# Altium PCB Ender-3.PcbDoc (part 12 of 14)
Units mil, origin at the board's own origin, x right, y up, seen from the top; angles counter-clockwise.
Board outline 3970.48 x 2769.68 mil, 2 copper layers (TopLayer, BottomLayer); 146 components, 136 nets, 669 pads, 614 vias.
Unrouted connection lines stored in the file: 1.
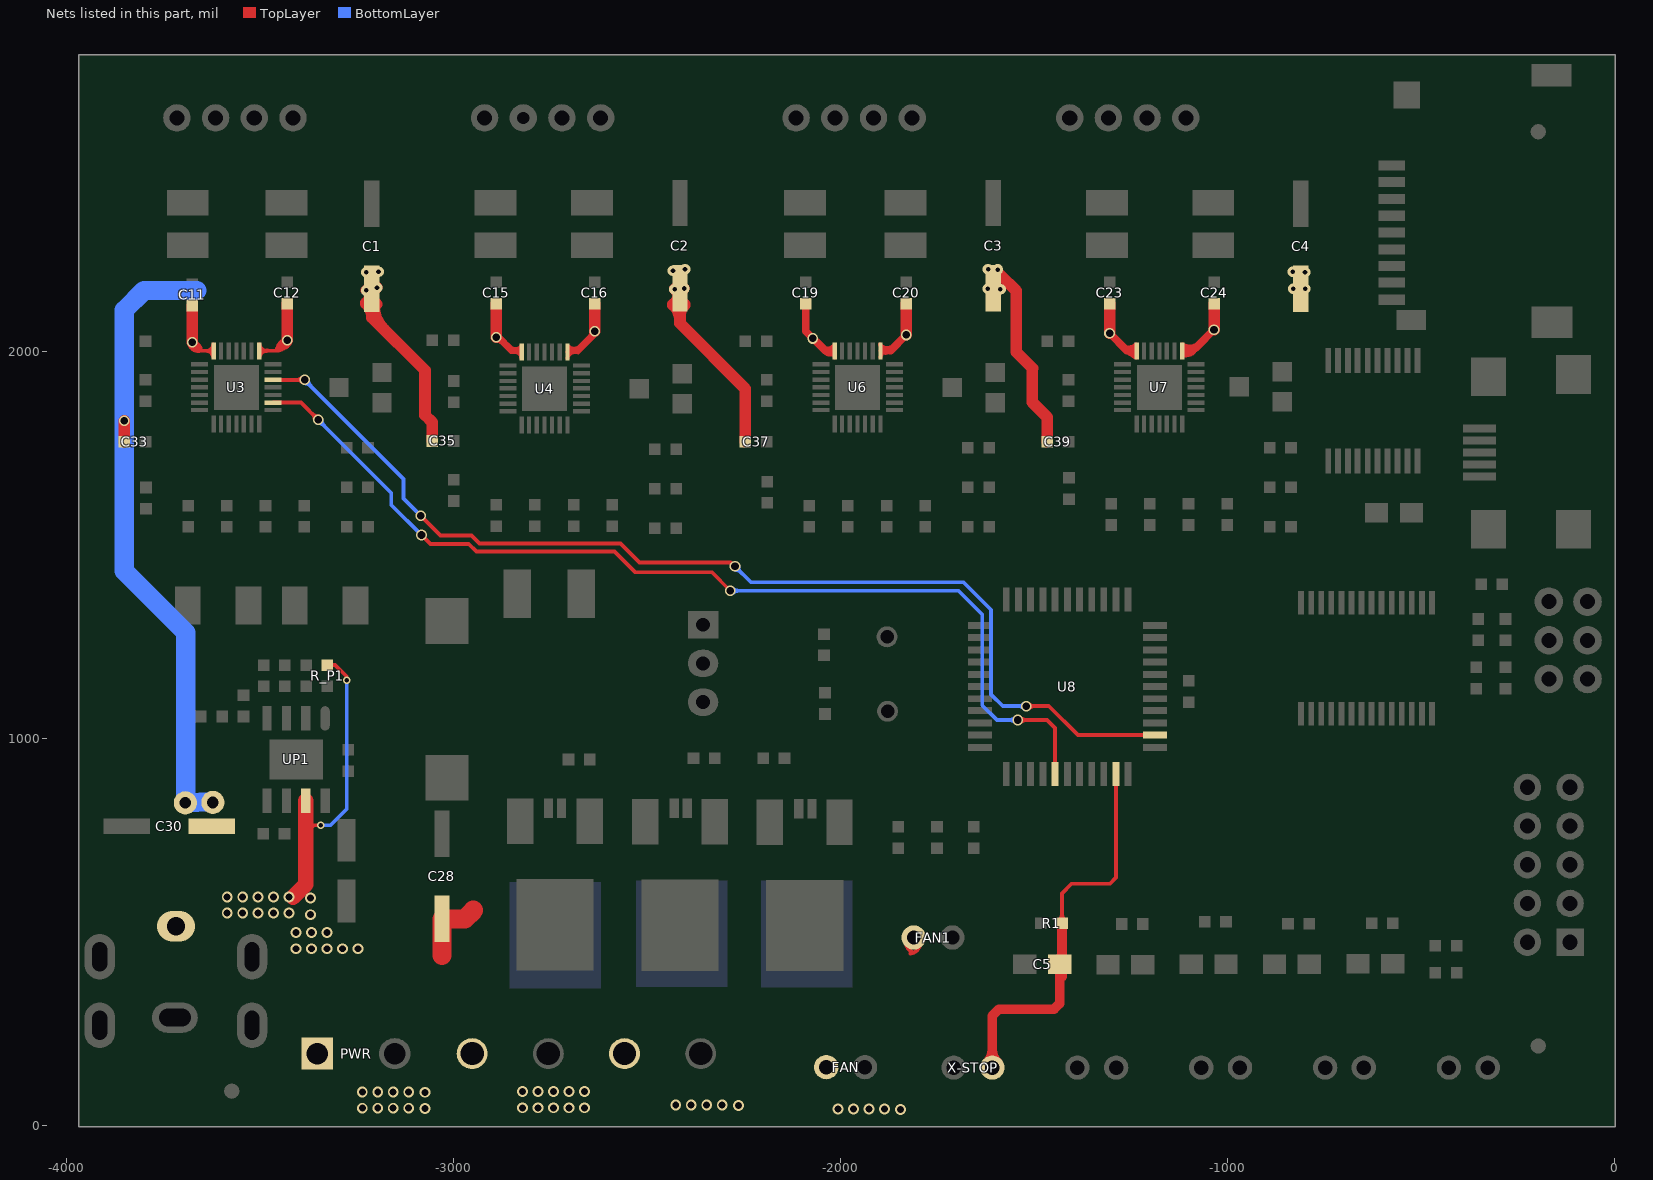
[diagram p12: the nets of this part, all layers, seen from the top]

## Via types
v1: diameter 28, hole 18, TopLayer to BottomLayer, tented both sides, 246 vias
v2: diameter 27.56, hole 19.68, TopLayer to BottomLayer, tented both sides, 196 vias
v3: diameter 20, hole 12, TopLayer to BottomLayer, tented both sides, 124 vias
v4: diameter 27.56, hole 11.81, TopLayer to BottomLayer, tented bottom, 16 vias
v5: diameter 27.56, hole 19.68, TopLayer to BottomLayer, 16 vias
v6: diameter 20, hole 12, TopLayer to BottomLayer, 12 vias
v7: diameter 28, hole 11.81, TopLayer to BottomLayer, tented both sides, 4 vias

## Nets (pads, with @x,y where several pads share a name; then routed paths per layer and width w, separated by ;. In a path a pad name is that pad's centre, name@x,y a point inside that pad or via, vN(x,y) a via of type N, cw(c..) or ccw(c..) an arc to the next point about the centre after c; other vN are vias at no path point) (continued)
VMOT: C1.1 C2.1 C3.1 C4.1 C11.2 C12.1 C15.2 C16.1 C19.2 C20.1 C23.2 C24.1 C28.1 C30.1 C33.2 C35.2 C37.2 C39.2 FAN1.2 FAN.2 pad.1@-2557.83,186.84 pad.1@-2951.54,186.84 pad.2 pad.3 PWR.2 R_P1.1 U3.22 U3.28 U4.22 U4.28 U6.22 U6.28 U7.22 U7.28 UP1.7 | length 13788.4
  TopLayer w10: v2@-3683.54,2022.84 ccw(c-3658.07,2028.34) -3652.57,2002.88 ; -3641.54,2002.88 cw(c-3639.05,1984.36) U3.28@-3620.54,1986.84 ; -3637.54,2002.88 ccw(c-3637.52,2019.86) U3.28@-3620.54,2019.84 ; U3.28@-3619.62,2002.88 -3652.57,2002.88 ; U3.22@-3501.62,2002.88 -3456.5,2002.88 ; U3.22@-3501.54,2019.84 ccw(c-3482.05,2022.36) -3479.54,2002.88 ; U3.22@-3500.54,1987.84 cw(c-3481.02,1983.36) -3476.54,2002.88 ; -3447.28,2012.09 ccw(c-3440.28,2029.84) -3437.2,2011.02 ; v2@-3422.54,2022.84 cw(c-3440.28,2029.84) -3437.2,2011.02 ; v2@-3420.54,2034.84 ccw(c-3422.54,2000.88) -3429.54,2034.17 ccw(c-3422.54,2000.88) -3456.5,2002.88 ; -3368.54,767.84 -3359.54,776.84 v3(-3342.54,776.84) ; R_P1.1@-3325.54,1190.84 -3305.54,1190.84 -3275.54,1160.84 v3(-3275.54,1151.84) ; v2(-2889.54,2037.84) -2851.54,1999.84 -2840.54,1999.84 ; v2@-2889.54,2039.06 cw(c-2889.54,2013.04) -2871.13,2031.44 ; v2@-2878.54,2038.84 -2850.54,2010.84 ; -2854.06,2014.37 ccw(c-2889.54,1978.9) v2@-2889.54,2029.06 ; -2842.54,1999.84 cw(c-2841.54,1982.84) -2840.68,1999.85 ; -2841.54,1999.84 ccw(c-2840.54,2015.84) -2840.15,1999.82 ; U4.28@-2824.54,1983.84 ccw(c-2841.54,1982.84) -2840.15,1999.82 ; U4.28@-2823.54,1999.84 -2840.54,1999.84 ; U4.22@-2705.54,1983.84 cw(c-2684.04,1978.34) -2689.54,1999.84 cw(c-2684.04,1978.34) -2689.03,1999.97 ; U4.22@-2705.04,1999.84 -2678.54,1999.84 ; -2677.54,1998.84 v2@-2632.54,2043.84 ; -2675.6,2012.78 cw(c-2688.54,2028.78) -2704.54,2015.84 ccw(c-2683.54,2020.84) -2689.03,1999.97 ; v2(-2634.54,2053.84) -2688.54,1999.84 ; -2050.35,2014.7 ccw(c-2034.52,2033.68) -2015.54,2017.84 cw(c-2034.52,2021.86) -2030.5,2002.88 cw(c-2034.52,2021.86) -2031.02,2002.78 ; -2048.54,2009.84 ccw(c-2025.04,2017.34) U6.28@-2017.67,1993.8 ; -2029.54,2002.88 ccw(c-2019.02,2004.36) -2029.46,2002.41 ; -2020.54,2002.88 cw(c-2029.54,2011.88) -2024.4,2000.24 ; U6.28@-2016.12,2002.88 -2038.54,2002.88 ; U6.28@-2014.54,1985.84 ccw(c-2035.05,1982.36) U6.28@-2017.67,1993.8 ; U6.22@-1896.62,2002.88 ccw(c-1883.58,2015.93) -1889.39,1998.42 ; U6.22@-1896.54,1986.84 cw(c-1875.52,1981.86) -1889.39,1998.42 ; U6.22@-1896.12,2002.88 -1870.54,2002.88 ; -1880.57,2002.88 cw(c-1875.56,2024.86) -1897.54,2019.84 ccw(c-1879.54,2030.84) -1868.54,2012.84 ; -1880.5,2002.88 cw(c-1875.52,1981.86) -1870.54,2002.88 ; FAN1.2@-1829.54,485.84 ccw(c-1801.04,476.34) -1810.54,447.84 ; -1818.54,445.84 ccw(c-1822.04,474.34) FAN1.2@-1793.54,477.84 ; -1275.46,2018.8 ccw(c-1256.52,2038.78) -1236.54,2019.84 cw(c-1256.52,2022.86) -1253.04,2002.96 ; -1248.54,2002.88 ccw(c-1233.52,2000.86) -1248.64,2001.81 ; U7.28@-1239.54,1993.84 cw(c-1245.02,2008.36) -1246.41,1992.91 ; U7.28@-1236.12,2002.88 -1259.54,2002.88 ; U7.22@-1117.54,1991.84 ccw(c-1109.04,2024.02) -1079.36,2008.96 ; U7.22@-1116.62,2002.88 ccw(c-1106.08,2013.43) -1095.84,2002.59 ; U7.22@-1116.12,2002.88 -1088.54,2002.88 ; -1096.54,2011.84 cw(c-1102.54,2025.84) -1116.54,2019.84 ccw(c-1096.54,2052.84) -1087.95,2015.22 ; -1095.54,2002.88 cw(c-1106.08,2013.43) -1095.84,2002.59 ; -1076.86,2015.52 cw(c-1109.04,2024.02) -1079.36,2008.96 ; -1075.31,2017.06 cw(c-1093.52,2021.08) -1079.36,2008.96 ; -1073.31,2017.06 ccw(c-1078.33,1997.86) -1074.96,2017.42 ccw(c-1078.33,1997.86) -1080.97,2017.53 ; -1063.54,2032.84 cw(c-1096.54,2052.84) -1080.97,2017.53 ; v2@-3674.54,2016.06 cw(c-3674.54,1994.87) -3659.55,2009.85 ; v2@-3674.54,2016.06 cw(c-3674.54,1994.87) -3659.55,2009.85 ; v2@-3674.54,2016.06 cw(c-3674.54,1994.87) -3659.55,2009.85 ; v2@-3674.54,2016.06 cw(c-3674.54,1994.87) -3659.55,2009.85 ; v2@-3674.54,2016.06 cw(c-3674.54,1994.87) -3659.55,2009.85 ; v2@-3674.54,2016.06 cw(c-3674.54,1994.87) -3659.55,2009.85 ; v2@-3674.54,2016.06 cw(c-3674.54,1994.87) -3659.55,2009.85 ; v2@-3674.54,2016.06 cw(c-3674.54,1994.87) -3659.55,2009.85 ; v2@-3674.54,2016.06 cw(c-3674.54,1994.87) -3659.55,2009.85 ; v2@-3665.76,2024.84 ccw(c-3644.56,2024.84) -3659.55,2009.85 ; v2@-3665.76,2024.84 ccw(c-3644.56,2024.84) -3659.55,2009.85 ; v2@-3665.76,2024.84 ccw(c-3644.56,2024.84) -3659.55,2009.85 ; v2@-3665.76,2024.84 ccw(c-3644.56,2024.84) -3659.55,2009.85 ; v2@-3665.76,2024.84 ccw(c-3644.56,2024.84) -3659.55,2009.85 ; v2@-3665.76,2024.84 ccw(c-3644.56,2024.84) -3659.55,2009.85 ; v2@-3665.76,2024.84 ccw(c-3644.56,2024.84) -3659.55,2009.85 ; v2@-3665.76,2024.84 ccw(c-3644.56,2024.84) -3659.55,2009.85 ; v2@-3665.76,2024.84 ccw(c-3644.56,2024.84) -3659.55,2009.85 ; -3652.57,2002.88 ccw(c-3674.54,2002.88) v2(-3674.54,2024.84) -3652.57,2002.88 ; -3456.5,2002.88 ccw(c-3456.5,2029.84) -3437.2,2011.02 ; -3456.5,2002.88 v2(-3429.54,2029.84) cw(c-3456.5,2029.84) -3437.2,2011.02 ; -3444.52,2014.85 cw(c-3429.54,1999.87) v2@-3429.54,2021.06 ; -3444.52,2014.85 ccw(c-3459.51,2029.84) v2@-3438.31,2029.84 ; -3444.52,2014.85 cw(c-3429.54,1999.87) v2@-3429.54,2021.06 ; -3444.52,2014.85 ccw(c-3459.51,2029.84) v2@-3438.31,2029.84 ; -3444.52,2014.85 cw(c-3429.54,1999.87) v2@-3429.54,2021.06 ; -3444.52,2014.85 ccw(c-3459.51,2029.84) v2@-3438.31,2029.84 ; -3444.52,2014.85 cw(c-3429.54,1999.87) v2@-3429.54,2021.06 ; -3444.52,2014.85 ccw(c-3459.51,2029.84) v2@-3438.31,2029.84 ; -3444.52,2014.85 cw(c-3429.54,1999.87) v2@-3429.54,2021.06 ; -3444.52,2014.85 ccw(c-3459.51,2029.84) v2@-3438.31,2029.84 ; -3444.52,2014.85 ccw(c-3459.51,2029.84) v2@-3438.31,2029.84 ; -3444.52,2014.85 cw(c-3429.54,1999.87) v2@-3429.54,2021.06 ; -3444.52,2014.85 ccw(c-3459.51,2029.84) v2@-3438.31,2029.84 ; -3444.52,2014.85 cw(c-3429.54,1999.87) v2@-3429.54,2021.06 ; -3444.52,2014.85 ccw(c-3459.51,2029.84) v2@-3438.31,2029.84 ; -3444.52,2014.85 cw(c-3429.54,1999.87) v2@-3429.54,2021.06 ; -3444.52,2014.85 ccw(c-3459.51,2029.84) v2@-3438.31,2029.84 ; -3444.52,2014.85 cw(c-3429.54,1999.87) v2@-3429.54,2021.06 ; v2@-2889.61,2039.06 cw(c-2888.17,2016.49) -2872.17,2032.48 ; v2@-2889.61,2039.06 cw(c-2888.17,2016.49) -2872.17,2032.48 ; v2@-2889.61,2039.06 cw(c-2888.17,2016.49) -2872.17,2032.48 ; v2@-2889.61,2039.06 cw(c-2888.17,2016.49) -2872.17,2032.48 ; v2@-2889.61,2039.06 cw(c-2888.17,2016.49) -2872.17,2032.48 ; v2@-2889.61,2039.06 cw(c-2888.17,2016.49) -2872.17,2032.48 ; v2@-2889.61,2039.06 cw(c-2888.17,2016.49) -2872.17,2032.48 ; v2@-2889.61,2039.06 cw(c-2888.17,2016.49) -2872.17,2032.48 ; v2@-2889.54,2029.06 cw(c-2889.54,2007.87) -2874.55,2022.85 ; v2@-2889.54,2029.06 cw(c-2889.54,2007.87) -2874.55,2022.85 ; v2@-2889.54,2029.06 cw(c-2889.54,2007.87) -2874.55,2022.85 ; v2@-2889.54,2029.06 cw(c-2889.54,2007.87) -2874.55,2022.85 ; v2@-2889.54,2029.06 cw(c-2889.54,2007.87) -2874.55,2022.85 ; v2@-2889.54,2029.06 cw(c-2889.54,2007.87) -2874.55,2022.85 ; v2@-2889.54,2029.06 cw(c-2889.54,2007.87) -2874.55,2022.85 ; v2@-2889.54,2029.06 cw(c-2889.54,2007.87) -2874.55,2022.85 ; v2@-2889.54,2029.06 cw(c-2889.54,2007.87) -2874.55,2022.85 ; v2@-2888.97,2029.08 cw(c-2886.29,1987.09) -2856.54,2016.84 ; v2@-2888.97,2029.08 cw(c-2886.29,1987.09) -2856.54,2016.84 ; v2@-2888.97,2029.08 cw(c-2886.29,1987.09) -2856.54,2016.84 ; v2@-2888.97,2029.08 cw(c-2886.29,1987.09) -2856.54,2016.84 ; v2@-2888.97,2029.08 cw(c-2886.29,1987.09) -2856.54,2016.84 ; v2@-2888.97,2029.08 cw(c-2886.29,1987.09) -2856.54,2016.84 ; v2@-2888.97,2029.08 cw(c-2886.29,1987.09) -2856.54,2016.84 ; v2@-2888.97,2029.08 cw(c-2886.29,1987.09) -2856.54,2016.84 ; v2@-2880.76,2037.84 ccw(c-2859.56,2037.84) -2874.55,2022.85 ; v2@-2880.76,2037.84 ccw(c-2859.56,2037.84) -2874.55,2022.85 ; v2@-2880.76,2037.84 ccw(c-2859.56,2037.84) -2874.55,2022.85 ; v2@-2880.76,2037.84 ccw(c-2859.56,2037.84) -2874.55,2022.85 ; v2@-2880.76,2037.84 ccw(c-2859.56,2037.84) -2874.55,2022.85 ; v2@-2880.76,2037.84 ccw(c-2859.56,2037.84) -2874.55,2022.85 ; v2@-2880.76,2037.84 ccw(c-2859.56,2037.84) -2874.55,2022.85 ; v2@-2880.76,2037.84 ccw(c-2859.56,2037.84) -2874.55,2022.85 ; v2@-2880.76,2037.84 ccw(c-2859.56,2037.84) -2874.55,2022.85 ; -2850.54,2010.84 ccw(c-2840.04,2010.34) -2840.68,1999.85 ; -2850.54,2010.84 ccw(c-2839.54,2025.84) -2824.54,2014.84 cw(c-2840.54,2015.84) -2839.54,1999.84 cw(c-2840.54,2015.84) -2840.15,1999.82 ; -2840.68,1999.85 cw(c-2841.54,1982.84) -2840.54,1999.84 ; -2840.68,1999.85 ccw(c-2840.04,2010.34) -2840.54,1999.84 ; -2840.54,1999.84 cw(c-2841.54,1982.84) -2840.15,1999.82 ; -2689.03,1999.97 ccw(c-2683.54,2020.84) -2688.54,1999.84 ; -2689.03,1999.97 cw(c-2684.04,1978.34) -2688.25,2000.13 cw(c-2684.04,1978.34) -2678.54,1999.84 ; -2688.54,1999.84 ccw(c-2683.54,2020.84) -2678.54,1999.84 ; -2658.01,2018.37 ccw(c-2693.48,2053.84) v2@-2643.31,2053.84 ; -2658.01,2018.37 ccw(c-2693.48,2053.84) v2@-2643.31,2053.84 ; -2658.01,2018.37 ccw(c-2693.48,2053.84) v2@-2643.31,2053.84 ; -2658.01,2018.37 ccw(c-2693.48,2053.84) v2@-2643.31,2053.84 ; -2658.01,2018.37 ccw(c-2693.48,2053.84) v2@-2643.31,2053.84 ; -2658.01,2018.37 ccw(c-2693.48,2053.84) v2@-2643.31,2053.84 ; -2658.01,2018.37 ccw(c-2693.48,2053.84) v2@-2643.31,2053.84 ; -2658.01,2018.37 ccw(c-2693.48,2053.84) v2@-2643.31,2053.84 ; -2658.01,2018.37 ccw(c-2693.48,2053.84) v2@-2643.31,2053.84 ; -2649.52,2038.85 cw(c-2634.54,2023.87) v2@-2634.54,2045.06 ; -2649.52,2038.85 ccw(c-2664.51,2053.84) v2@-2643.31,2053.84 ; -2649.52,2038.85 cw(c-2634.54,2023.87) v2@-2634.54,2045.06 ; -2649.52,2038.85 ccw(c-2664.51,2053.84) v2@-2643.31,2053.84 ; -2649.52,2038.85 cw(c-2634.54,2023.87) v2@-2634.54,2045.06 ; -2649.52,2038.85 ccw(c-2664.51,2053.84) v2@-2643.31,2053.84 ; -2649.52,2038.85 cw(c-2634.54,2023.87) v2@-2634.54,2045.06 ; -2649.52,2038.85 ccw(c-2664.51,2053.84) v2@-2643.31,2053.84 ; -2649.52,2038.85 cw(c-2634.54,2023.87) v2@-2634.54,2045.06 ; -2649.52,2038.85 ccw(c-2664.51,2053.84) v2@-2643.31,2053.84 ; -2649.52,2038.85 ccw(c-2664.51,2053.84) v2@-2643.31,2053.84 ; -2649.52,2038.85 cw(c-2634.54,2023.87) v2@-2634.54,2045.06 ; -2649.52,2038.85 ccw(c-2664.51,2053.84) v2@-2643.31,2053.84 ; -2649.52,2038.85 cw(c-2634.54,2023.87) v2@-2634.54,2045.06 ; -2649.52,2038.85 ccw(c-2664.51,2053.84) v2@-2643.31,2053.84 ; -2649.52,2038.85 cw(c-2634.54,2023.87) v2@-2634.54,2045.06 ; -2649.52,2038.85 ccw(c-2664.51,2053.84) v2@-2643.31,2053.84 ; -2649.52,2038.85 cw(c-2634.54,2023.87) v2@-2634.54,2045.06 ; -2640.94,2035.44 ccw(c-2659.34,2053.84) v2@-2633.31,2053.84 ; -2640.94,2035.44 ccw(c-2659.34,2053.84) v2@-2633.31,2053.84 ; -2640.94,2035.44 ccw(c-2659.34,2053.84) v2@-2633.31,2053.84 ; -2640.94,2035.44 ccw(c-2659.34,2053.84) v2@-2633.31,2053.84 ; -2640.94,2035.44 ccw(c-2659.34,2053.84) v2@-2633.31,2053.84 ; -2640.94,2035.44 ccw(c-2659.34,2053.84) v2@-2633.31,2053.84 ; -2640.94,2035.44 ccw(c-2659.34,2053.84) v2@-2633.31,2053.84 ; -2640.94,2035.44 ccw(c-2659.34,2053.84) v2@-2633.31,2053.84 ; -2640.94,2035.44 ccw(c-2659.34,2053.84) v2@-2633.31,2053.84 ; -2038.54,2002.88 ccw(c-2029.54,2011.88) -2028.31,1999.21 ; -2038.53,2002.88 ccw(c-2034.52,2021.86) -2031.02,2002.78 ; -2038.53,2002.88 cw(c-2035.05,1982.36) -2031.57,2002.88 cw(c-2035.05,1982.36) -2031.02,2002.78 ; -2031.02,2002.78 cw(c-2035.05,1982.36) -2029.46,2002.41 ; -2029.46,2002.41 ccw(c-2019.02,2004.36) -2028.31,1999.21 ; -2029.46,2002.41 cw(c-2035.05,1982.36) -2024.4,2000.24 ; -2028.31,1999.21 ccw(c-2029.54,2011.88) -2024.4,2000.24 ; -2028.31,1999.21 ccw(c-2019.02,2004.36) U6.28@-2017.68,1993.82 ; -2024.4,2000.24 cw(c-2035.05,1982.36) U6.28@-2017.68,1993.82 ; U6.28@-2017.67,1993.8 ccw(c-2025.04,2017.34) -2017.54,1993.84 cw(c-2019.02,2004.36) U6.28@-2017.68,1993.82 ; -1889.39,1998.42 cw(c-1875.52,1981.86) -1880.53,2002.87 ccw(c-1875.56,2024.86) -1870.54,2002.88 ; -1889.39,1998.42 ccw(c-1883.58,2015.93) -1870.54,2002.88 ; -1259.53,2002.88 ccw(c-1256.52,2022.86) -1253.5,2002.88 ccw(c-1256.52,2022.86) -1253.04,2002.96 ; -1259.54,2002.88 ccw(c-1245.02,2008.36) -1246.41,1992.91 ; -1259.53,2002.88 cw(c-1256.05,1982.36) -1253.04,2002.96 ; -1253.04,2002.96 cw(c-1256.05,1982.36) -1252.57,2002.88 cw(c-1256.05,1982.36) -1248.64,2001.81 ; -1248.64,2001.81 cw(c-1256.05,1982.36) -1235.54,1985.84 cw(c-1233.52,2000.86) -1246.41,1992.91 ; -1248.64,2001.81 ccw(c-1233.52,2000.86) -1246.41,1992.91 ; -1095.84,2002.59 cw(c-1093.52,2021.08) -1097.54,2002.88 cw(c-1078.33,1997.86) -1087.95,2015.22 ; -1095.84,2002.59 ccw(c-1093.52,2021.08) -1089.5,2002.88 ccw(c-1093.52,2021.08) -1079.36,2008.96 ; -1087.95,2015.22 cw(c-1078.33,1997.86) -1080.97,2017.53 ; -1087.95,2015.22 ccw(c-1096.54,2052.84) -1080.97,2017.53
  TopLayer w20: C19.2@-2089.54,2124.84 -2089.54,2053.88 -2038.54,2002.88 ; -1870.54,2002.88 v2(-1829.54,2043.88) ; v2(-1304.54,2047.88) -1259.54,2002.88 ; -1082.54,2009.84 v2@-1028.54,2063.84
  TopLayer w30: C33.2@-3850.62,1767.88 v2(-3850.62,1821.76) ; v2(-3674.54,2024.84) C11.2@-3674.54,2119.84 ; v2(-3429.54,2029.84) C12.1@-3429.54,2124.84 ; C1.1@-3226.67,2126.71 cw(c-3265.42,2087.96) -3210.62,2087.96 ; C35.2@-3054.54,1769.84 -3054.54,1817.84 -3073.54,1836.84 -3073.54,1952.84 -3210.62,2089.93 ; v2(-2889.54,2037.84) C15.2@-2889.54,2124.84 ; v2(-2634.54,2053.84) C16.1@-2634.54,2124.84 ; C2.1@-2414.54,2164.84 -2414.54,2073.84 -2245.62,1904.93 C37.2@-2245.62,1767.88 ; v2(-1829.54,2043.88) C20.1@-1829.54,2124.84 ; C3.1@-1586.54,2198.84 -1545.54,2157.84 -1545.54,1999.84 -1503.54,1957.84 ; -1504.54,1956.84 -1504.54,1869.84 -1465.62,1830.93 C39.2@-1465.62,1767.88 ; v2(-1304.54,2047.88) C23.2@-1304.54,2124.84 ; v2(-1034.54,2056.88) C24.1@-1034.54,2124.84 ; C1.1@-3226.69,2124.97 ccw(c-3263.4,2162.88) C1.1@-3210.62,2162.88 ; C1.1@-3226.69,2124.97 ccw(c-3263.4,2162.88) C1.1@-3210.62,2162.88 ; C1.1@-3226.69,2124.97 ccw(c-3263.4,2162.88) C1.1@-3210.62,2162.88 ; C1.1@-3226.69,2124.97 ccw(c-3263.4,2162.88) C1.1@-3210.62,2162.88 ; C1.1@-3226.69,2124.97 ccw(c-3263.4,2162.88) C1.1@-3210.62,2162.88 ; C1.1@-3226.69,2124.97 ccw(c-3263.4,2162.88) C1.1@-3210.62,2162.88 ; C1.1@-3226.69,2124.97 ccw(c-3263.4,2162.88) C1.1@-3210.62,2162.88 ; C1.1@-3226.69,2124.97 ccw(c-3263.4,2162.88) C1.1@-3210.62,2162.88 ; C1.1@-3226.69,2124.97 ccw(c-3263.4,2162.88) C1.1@-3210.62,2162.88 ; C1.1@-3226.71,2126.74 cw(c-3260.78,2089.93) -3210.62,2089.93 ; C1.1@-3226.71,2126.74 cw(c-3260.78,2089.93) -3210.62,2089.93 ; C1.1@-3226.71,2126.74 cw(c-3260.78,2089.93) -3210.62,2089.93 ; C1.1@-3226.71,2126.74 cw(c-3260.78,2089.93) -3210.62,2089.93 ; C1.1@-3226.71,2126.74 cw(c-3260.78,2089.93) -3210.62,2089.93 ; C1.1@-3226.71,2126.74 cw(c-3260.78,2089.93) -3210.62,2089.93 ; C1.1@-3226.71,2126.74 cw(c-3260.78,2089.93) -3210.62,2089.93 ; C1.1@-3226.71,2126.74 cw(c-3260.78,2089.93) -3210.62,2089.93 ; C1.1@-3224.67,2159.71 cw(c-3258.59,2125.79) C1.1@-3210.62,2125.79 ; C1.1@-3224.67,2159.71 cw(c-3258.59,2125.79) C1.1@-3210.62,2125.79 ; C1.1@-3224.67,2159.71 cw(c-3258.59,2125.79) C1.1@-3210.62,2125.79 ; C1.1@-3224.67,2159.71 cw(c-3258.59,2125.79) C1.1@-3210.62,2125.79 ; C1.1@-3224.67,2159.71 cw(c-3258.59,2125.79) C1.1@-3210.62,2125.79 ; C1.1@-3224.67,2159.71 cw(c-3258.59,2125.79) C1.1@-3210.62,2125.79 ; C1.1@-3224.67,2159.71 cw(c-3258.59,2125.79) C1.1@-3210.62,2125.79 ; C1.1@-3224.67,2159.71 cw(c-3258.59,2125.79) C1.1@-3210.62,2125.79 ; C1.1@-3224.67,2159.71 cw(c-3258.59,2125.79) C1.1@-3210.62,2125.79 ; -3210.62,2089.93 C1.1@-3210.62,2162.88 ; C1.1@-3210.62,2137.19 cw(c-3168.89,2137.19) C1.1@-3198.4,2166.71 ; C1.1@-3210.62,2137.19 cw(c-3168.89,2137.19) C1.1@-3198.4,2166.71 ; C1.1@-3210.62,2137.19 cw(c-3168.89,2137.19) C1.1@-3198.4,2166.71 ; C1.1@-3210.62,2137.19 cw(c-3168.89,2137.19) C1.1@-3198.4,2166.71 ; C1.1@-3210.62,2137.19 cw(c-3168.89,2137.19) C1.1@-3198.4,2166.71 ; C1.1@-3210.62,2137.19 cw(c-3168.89,2137.19) C1.1@-3198.4,2166.71 ; C1.1@-3210.62,2137.19 cw(c-3168.89,2137.19) C1.1@-3198.4,2166.71 ; C1.1@-3210.62,2137.19 cw(c-3168.89,2137.19) C1.1@-3198.4,2166.71 ; C1.1@-3210.62,2137.19 cw(c-3168.89,2137.19) C1.1@-3198.4,2166.71 ; C1.1@-3210.62,2152.49 ccw(c-3168.89,2152.49) C1.1@-3198.4,2122.98 ; C1.1@-3210.62,2152.49 ccw(c-3168.89,2152.49) C1.1@-3198.4,2122.98 ; C1.1@-3210.62,2152.49 ccw(c-3168.89,2152.49) C1.1@-3198.4,2122.98 ; C1.1@-3210.62,2152.49 ccw(c-3168.89,2152.49) C1.1@-3198.4,2122.98 ; C1.1@-3210.62,2152.49 ccw(c-3168.89,2152.49) C1.1@-3198.4,2122.98 ; C1.1@-3210.62,2152.49 ccw(c-3168.89,2152.49) C1.1@-3198.4,2122.98 ; C1.1@-3210.62,2152.49 ccw(c-3168.89,2152.49) C1.1@-3198.4,2122.98 ; C1.1@-3210.62,2152.49 ccw(c-3168.89,2152.49) C1.1@-3198.4,2122.98 ; C1.1@-3210.62,2152.49 ccw(c-3168.89,2152.49) C1.1@-3198.4,2122.98 ; C1.1@-3205.86,2121.37 ccw(c-3160.55,2107.05) -3194.15,2073.46 ; C1.1@-3205.86,2121.37 ccw(c-3160.55,2107.05) -3194.15,2073.46 ; C1.1@-3205.86,2121.37 ccw(c-3160.55,2107.05) -3194.15,2073.46 ; C1.1@-3205.86,2121.37 ccw(c-3160.55,2107.05) -3194.15,2073.46 ; C1.1@-3205.86,2121.37 ccw(c-3160.55,2107.05) -3194.15,2073.46 ; C1.1@-3205.86,2121.37 ccw(c-3160.55,2107.05) -3194.15,2073.46 ; C1.1@-3205.86,2121.37 ccw(c-3160.55,2107.05) -3194.15,2073.46 ; C1.1@-3205.86,2121.37 ccw(c-3160.55,2107.05) -3194.15,2073.46 ; C1.1@-3205.62,2122.88 ccw(c-3114,2122.88) -3178.79,2058.09 ; C1.1@-3205.62,2122.88 ccw(c-3114,2122.88) -3178.79,2058.09 ; C1.1@-3205.62,2122.88 ccw(c-3114,2122.88) -3178.79,2058.09 ; C1.1@-3205.62,2122.88 ccw(c-3114,2122.88) -3178.79,2058.09 ; C1.1@-3205.62,2122.88 ccw(c-3114,2122.88) -3178.79,2058.09 ; C1.1@-3205.62,2122.88 ccw(c-3114,2122.88) -3178.79,2058.09 ; C1.1@-3205.62,2122.88 ccw(c-3114,2122.88) -3178.79,2058.09 ; C1.1@-3205.62,2122.88 ccw(c-3114,2122.88) -3178.79,2058.09 ; C1.1@-3205.62,2122.88 ccw(c-3114,2122.88) -3178.79,2058.09 ; C2.1@-2432.67,2120.98 ccw(c-2476.46,2164.77) C2.1@-2414.54,2164.77 ; C2.1@-2432.67,2120.98 ccw(c-2476.46,2164.77) C2.1@-2414.54,2164.77 ; C2.1@-2432.67,2120.98 ccw(c-2476.46,2164.77) C2.1@-2414.54,2164.77 ; C2.1@-2432.67,2120.98 ccw(c-2476.46,2164.77) C2.1@-2414.54,2164.77 ; C2.1@-2432.67,2120.98 ccw(c-2476.46,2164.77) C2.1@-2414.54,2164.77 ; C2.1@-2432.67,2120.98 ccw(c-2476.46,2164.77) C2.1@-2414.54,2164.77 ; C2.1@-2432.67,2120.98 ccw(c-2476.46,2164.77) C2.1@-2414.54,2164.77 ; C2.1@-2432.67,2120.98 ccw(c-2476.46,2164.77) C2.1@-2414.54,2164.77 ; C2.1@-2432.67,2120.98 ccw(c-2476.46,2164.77) C2.1@-2414.54,2164.77 ; C2.1@-2432.67,2122.71 cw(c-2476.46,2078.92) -2414.54,2078.92 ; C2.1@-2432.67,2122.71 cw(c-2476.46,2078.92) -2414.54,2078.92 ; C2.1@-2432.67,2122.71 cw(c-2476.46,2078.92) -2414.54,2078.92 ; C2.1@-2432.67,2122.71 cw(c-2476.46,2078.92) -2414.54,2078.92 ; C2.1@-2432.67,2122.71 cw(c-2476.46,2078.92) -2414.54,2078.92 ; C2.1@-2432.67,2122.71 cw(c-2476.46,2078.92) -2414.54,2078.92 ; C2.1@-2432.67,2122.71 cw(c-2476.46,2078.92) -2414.54,2078.92 ; C2.1@-2432.67,2122.71 cw(c-2476.46,2078.92) -2414.54,2078.92 ; C2.1@-2432.67,2122.71 cw(c-2476.46,2078.92) -2414.54,2078.92 ; C2.1@-2427.67,2162.71 cw(c-2459.39,2130.99) C2.1@-2414.54,2130.99 ; C2.1@-2427.67,2162.71 cw(c-2459.39,2130.99) C2.1@-2414.54,2130.99 ; C2.1@-2427.67,2162.71 cw(c-2459.39,2130.99) C2.1@-2414.54,2130.99 ; C2.1@-2427.67,2162.71 cw(c-2459.39,2130.99) C2.1@-2414.54,2130.99 ; C2.1@-2427.67,2162.71 cw(c-2459.39,2130.99) C2.1@-2414.54,2130.99 ; C2.1@-2427.67,2162.71 cw(c-2459.39,2130.99) C2.1@-2414.54,2130.99 ; C2.1@-2427.67,2162.71 cw(c-2459.39,2130.99) C2.1@-2414.54,2130.99 ; C2.1@-2427.67,2162.71 cw(c-2459.39,2130.99) C2.1@-2414.54,2130.99 ; C2.1@-2427.67,2162.71 cw(c-2459.39,2130.99) C2.1@-2414.54,2130.99 ; -2414.54,2093.4 cw(c-2373.1,2093.4) C2.1@-2402.4,2122.71 ; -2414.54,2093.4 cw(c-2373.1,2093.4) C2.1@-2402.4,2122.71 ; -2414.54,2093.4 cw(c-2373.1,2093.4) C2.1@-2402.4,2122.71 ; -2414.54,2093.4 cw(c-2373.1,2093.4) C2.1@-2402.4,2122.71 ; -2414.54,2093.4 cw(c-2373.1,2093.4) C2.1@-2402.4,2122.71 ; -2414.54,2093.4 cw(c-2373.1,2093.4) C2.1@-2402.4,2122.71 ; -2414.54,2093.4 cw(c-2373.1,2093.4) C2.1@-2402.4,2122.71 ; -2414.54,2093.4 cw(c-2373.1,2093.4) C2.1@-2402.4,2122.71 ; -2414.54,2093.4 cw(c-2373.1,2093.4) C2.1@-2402.4,2122.71 ; C2.1@-2414.54,2140.23 cw(c-2379.93,2140.23) C2.1@-2404.4,2164.71 ; C2.1@-2414.54,2140.23 cw(c-2379.93,2140.23) C2.1@-2404.4,2164.71 ; C2.1@-2414.54,2140.23 cw(c-2379.93,2140.23) C2.1@-2404.4,2164.71 ; C2.1@-2414.54,2140.23 cw(c-2379.93,2140.23) C2.1@-2404.4,2164.71 ; C2.1@-2414.54,2140.23 cw(c-2379.93,2140.23) C2.1@-2404.4,2164.71 ; C2.1@-2414.54,2140.23 cw(c-2379.93,2140.23) C2.1@-2404.4,2164.71 ; C2.1@-2414.54,2140.23 cw(c-2379.93,2140.23) C2.1@-2404.4,2164.71 ; C2.1@-2414.54,2140.23 cw(c-2379.93,2140.23) C2.1@-2404.4,2164.71 ; C2.1@-2414.54,2140.23 cw(c-2379.93,2140.23) C2.1@-2404.4,2164.71 ; C2.1@-2414.54,2150.28 ccw(c-2373.1,2150.28) C2.1@-2402.4,2120.98 ; C2.1@-2414.54,2150.28 ccw(c-2373.1,2150.28) C2.1@-2402.4,2120.98 ; C2.1@-2414.54,2150.28 ccw(c-2373.1,2150.28) C2.1@-2402.4,2120.98 ; C2.1@-2414.54,2150.28 ccw(c-2373.1,2150.28) C2.1@-2402.4,2120.98 ; C2.1@-2414.54,2150.28 ccw(c-2373.1,2150.28) C2.1@-2402.4,2120.98 ; C2.1@-2414.54,2150.28 ccw(c-2373.1,2150.28) C2.1@-2402.4,2120.98 ; C2.1@-2414.54,2150.28 ccw(c-2373.1,2150.28) C2.1@-2402.4,2120.98 ; C2.1@-2414.54,2150.28 ccw(c-2373.1,2150.28) C2.1@-2402.4,2120.98 ; C2.1@-2414.54,2150.28 ccw(c-2373.1,2150.28) C2.1@-2402.4,2120.98
  TopLayer w40: v1@-3414.54,590.84 -3381.54,623.84 UP1.7@-3381.54,840.54
  TopLayer w50: -3029.54,440.84 C28.1@-3029.54,534.84 -2970.54,534.84 -2948.54,556.84
  BottomLayer w10: v3(-3342.54,776.84) -3317.54,776.84 -3275.54,818.84 v3(-3275.54,1151.84)
  BottomLayer w50: pad.2@-3692.54,834.84 -3623.59,837.73 pad.3@-3621.54,835.84 ; pad.2@-3691.54,840.84 -3691.54,1274.84 -3850.62,1433.93 -3850.62,2107.76 -3799.54,2158.84 -3663.54,2158.84
  other v1: -1844.54,42.84 -2006.54,43.84 -1966.54,43.84 -1926.54,43.84 -1886.54,43.84 -3073.54,44.84 -3235.54,45.84 -3195.54,45.84 -3155.54,45.84 -3115.54,45.84 -2821.54,46.84 -2781.54,46.84 -2741.54,46.84 -2701.54,46.84 -2661.54,46.84 -2263.54,52.84 -2425.54,53.84 -2385.54,53.84 -2345.54,53.84 -2305.54,53.84 -3073.54,86.84 -3235.54,87.84 -3195.54,87.84 -3155.54,87.84 -3115.54,87.84 -2821.54,88.84 -2781.54,88.84 -2741.54,88.84 -2701.54,88.84 -2661.54,88.84 -3406.54,457.84 -3366.54,457.84 -3326.54,457.84 -3286.54,457.84 -3246.54,457.84 -3406.54,499.84 -3366.54,499.84 -3326.54,499.84 -3369.54,545.84 -3584.54,549.84 -3544.54,549.84 -3504.54,549.84 -3464.54,549.84 -3424.54,549.84 -3369.54,588.84 -3584.54,591.84 -3544.54,591.84 -3504.54,591.84 -3464.54,591.84 -3424.54,591.84
  other v2: -2071.54,2034.84
  other v4: -3225.54,2158.84 -2428.54,2161.84 -1586.54,2161.84 -1619.54,2162.84 -829.54,2162.84 -798.54,2162.84 -2403.54,2163.84 -3197.54,2165.84 -3225.54,2205.84 -799.54,2205.84 -3193.54,2206.84 -831.54,2206.84 -2432.54,2209.84 -1593.54,2212.84 -2401.54,2213.84 -1618.54,2213.84
X-DIR: U3.19 U8.24 | length 4307.7
  TopLayer w10: U3.19@-3465.62,1927.88 v2(-3384.5,1927.88) ; v2(-3084.04,1576.34) -3033.54,1525.84 -2953.54,1525.84 -2932.69,1505 -2568,1505 -2518.84,1455.84 -2283.54,1455.84 v2@-2271.54,1443.84 ; v2(-1519.54,1084.84) -1461.54,1084.84 -1386.54,1009.84 U8.24@-1187.54,1009.84 ; -3405.69,1927.88 cw(c-3405.69,1906.69) v2@-3390.7,1921.67 ; -3405.69,1927.88 ccw(c-3405.69,1949.08) v2@-3390.7,1934.09 ; -3405.69,1927.88 cw(c-3405.69,1906.69) v2@-3390.7,1921.67 ; -3405.69,1927.88 ccw(c-3405.69,1949.08) v2@-3390.7,1934.09 ; -3405.69,1927.88 cw(c-3405.69,1906.69) v2@-3390.7,1921.67 ; -3405.69,1927.88 ccw(c-3405.69,1949.08) v2@-3390.7,1934.09 ; -3405.69,1927.88 cw(c-3405.69,1906.69) v2@-3390.7,1921.67 ; -3405.69,1927.88 ccw(c-3405.69,1949.08) v2@-3390.7,1934.09 ; -3405.69,1927.88 cw(c-3405.69,1906.69) v2@-3390.7,1921.67 ; -3405.69,1927.88 ccw(c-3405.69,1949.08) v2@-3390.7,1934.09 ; -3405.69,1927.88 ccw(c-3405.69,1949.08) v2@-3390.7,1934.09 ; -3405.69,1927.88 cw(c-3405.69,1906.69) v2@-3390.7,1921.67 ; -3405.69,1927.88 ccw(c-3405.69,1949.08) v2@-3390.7,1934.09 ; -3405.69,1927.88 cw(c-3405.69,1906.69) v2@-3390.7,1921.67 ; -3405.69,1927.88 ccw(c-3405.69,1949.08) v2@-3390.7,1934.09 ; -3405.69,1927.88 cw(c-3405.69,1906.69) v2@-3390.7,1921.67 ; -3405.69,1927.88 ccw(c-3405.69,1949.08) v2@-3390.7,1934.09 ; -3405.69,1927.88 cw(c-3405.69,1906.69) v2@-3390.7,1921.67 ; v2@-1513.33,1078.63 cw(c-1498.34,1063.65) -1498.34,1084.84 ; v2@-1513.33,1078.63 cw(c-1498.34,1063.65) -1498.34,1084.84 ; v2@-1513.33,1078.63 cw(c-1498.34,1063.65) -1498.34,1084.84 ; v2@-1513.33,1078.63 cw(c-1498.34,1063.65) -1498.34,1084.84 ; v2@-1513.33,1078.63 cw(c-1498.34,1063.65) -1498.34,1084.84 ; v2@-1513.33,1078.63 cw(c-1498.34,1063.65) -1498.34,1084.84 ; v2@-1513.33,1078.63 cw(c-1498.34,1063.65) -1498.34,1084.84 ; v2@-1513.33,1078.63 cw(c-1498.34,1063.65) -1498.34,1084.84 ; v2@-1513.33,1078.63 cw(c-1498.34,1063.65) -1498.34,1084.84 ; v2@-1513.33,1091.05 ccw(c-1498.34,1106.04) -1498.34,1084.84 ; v2@-1513.33,1091.05 ccw(c-1498.34,1106.04) -1498.34,1084.84 ; v2@-1513.33,1091.05 ccw(c-1498.34,1106.04) -1498.34,1084.84 ; v2@-1513.33,1091.05 ccw(c-1498.34,1106.04) -1498.34,1084.84 ; v2@-1513.33,1091.05 ccw(c-1498.34,1106.04) -1498.34,1084.84 ; v2@-1513.33,1091.05 ccw(c-1498.34,1106.04) -1498.34,1084.84 ; v2@-1513.33,1091.05 ccw(c-1498.34,1106.04) -1498.34,1084.84 ; v2@-1513.33,1091.05 ccw(c-1498.34,1106.04) -1498.34,1084.84 ; v2@-1513.33,1091.05 ccw(c-1498.34,1106.04) -1498.34,1084.84 ; -1219.19,1009.84 cw(c-1219.19,1000.19) U8.24@-1212.36,1007.01 ; -1219.19,1009.84 ccw(c-1219.19,1019.5) U8.24@-1212.36,1012.67 ; -1219.19,1009.84 cw(c-1219.19,1000.19) U8.24@-1212.36,1007.01 ; -1219.19,1009.84 ccw(c-1219.19,1019.5) U8.24@-1212.36,1012.67 ; -1219.19,1009.84 cw(c-1219.19,1000.19) U8.24@-1212.36,1007.01 ; -1219.19,1009.84 ccw(c-1219.19,1019.5) U8.24@-1212.36,1012.67 ; -1219.19,1009.84 ccw(c-1219.19,1019.5) U8.24@-1212.36,1012.67 ; -1219.19,1009.84 cw(c-1219.19,1000.19) U8.24@-1212.36,1007.01 ; -1219.19,1009.84 ccw(c-1219.19,1019.5) U8.24@-1212.36,1012.67 ; -1219.19,1009.84 cw(c-1219.19,1000.19) U8.24@-1212.36,1007.01 ; -1219.19,1009.84 ccw(c-1219.19,1019.5) U8.24@-1212.36,1012.67 ; -1219.19,1009.84 cw(c-1219.19,1000.19) U8.24@-1212.36,1007.01
  BottomLayer w10: v2(-3384.5,1927.88) -3128.54,1671.92 -3128.54,1620.84 v2(-3084.04,1576.34) ; v2(-2272.54,1445.84) -2231.54,1404.84 -1681.54,1404.84 -1610.54,1333.84 -1610.54,1114.84 -1580.54,1084.84 v2(-1519.54,1084.84) ; v2@-3384.5,1919.1 cw(c-3384.5,1897.91) -3369.51,1912.89 ; v2@-3384.5,1919.1 cw(c-3384.5,1897.91) -3369.51,1912.89 ; v2@-3384.5,1919.1 cw(c-3384.5,1897.91) -3369.51,1912.89 ; v2@-3384.5,1919.1 cw(c-3384.5,1897.91) -3369.51,1912.89 ; v2@-3384.5,1919.1 cw(c-3384.5,1897.91) -3369.51,1912.89 ; v2@-3384.5,1919.1 cw(c-3384.5,1897.91) -3369.51,1912.89 ; v2@-3384.5,1919.1 cw(c-3384.5,1897.91) -3369.51,1912.89 ; v2@-3384.5,1919.1 cw(c-3384.5,1897.91) -3369.51,1912.89 ; v2@-3384.5,1919.1 cw(c-3384.5,1897.91) -3369.51,1912.89 ; v2@-3375.72,1927.88 ccw(c-3354.52,1927.88) -3369.51,1912.89 ; v2@-3375.72,1927.88 ccw(c-3354.52,1927.88) -3369.51,1912.89 ; v2@-3375.72,1927.88 ccw(c-3354.52,1927.88) -3369.51,1912.89 ; v2@-3375.72,1927.88 ccw(c-3354.52,1927.88) -3369.51,1912.89 ; v2@-3375.72,1927.88 ccw(c-3354.52,1927.88) -3369.51,1912.89 ; v2@-3375.72,1927.88 ccw(c-3354.52,1927.88) -3369.51,1912.89 ; v2@-3375.72,1927.88 ccw(c-3354.52,1927.88) -3369.51,1912.89 ; v2@-3375.72,1927.88 ccw(c-3354.52,1927.88) -3369.51,1912.89 ; v2@-3375.72,1927.88 ccw(c-3354.52,1927.88) -3369.51,1912.89 ; v2@-2272.54,1437.06 cw(c-2272.54,1415.87) -2257.55,1430.85 ; v2@-2272.54,1437.06 cw(c-2272.54,1415.87) -2257.55,1430.85 ; v2@-2272.54,1437.06 cw(c-2272.54,1415.87) -2257.55,1430.85 ; v2@-2272.54,1437.06 cw(c-2272.54,1415.87) -2257.55,1430.85 ; v2@-2272.54,1437.06 cw(c-2272.54,1415.87) -2257.55,1430.85 ; v2@-2272.54,1437.06 cw(c-2272.54,1415.87) -2257.55,1430.85 ; v2@-2272.54,1437.06 cw(c-2272.54,1415.87) -2257.55,1430.85 ; v2@-2272.54,1437.06 cw(c-2272.54,1415.87) -2257.55,1430.85 ; v2@-2272.54,1437.06 cw(c-2272.54,1415.87) -2257.55,1430.85 ; v2@-2263.76,1445.84 ccw(c-2242.56,1445.84) -2257.55,1430.85 ; v2@-2263.76,1445.84 ccw(c-2242.56,1445.84) -2257.55,1430.85 ; v2@-2263.76,1445.84 ccw(c-2242.56,1445.84) -2257.55,1430.85 ; v2@-2263.76,1445.84 ccw(c-2242.56,1445.84) -2257.55,1430.85 ; v2@-2263.76,1445.84 ccw(c-2242.56,1445.84) -2257.55,1430.85 ; v2@-2263.76,1445.84 ccw(c-2242.56,1445.84) -2257.55,1430.85 ; v2@-2263.76,1445.84 ccw(c-2242.56,1445.84) -2257.55,1430.85 ; v2@-2263.76,1445.84 ccw(c-2242.56,1445.84) -2257.55,1430.85 ; v2@-2263.76,1445.84 ccw(c-2242.56,1445.84) -2257.55,1430.85 ; -1540.73,1084.84 cw(c-1540.73,1063.65) v2@-1525.74,1078.63 ; -1540.73,1084.84 ccw(c-1540.73,1106.04) v2@-1525.74,1091.05 ; -1540.73,1084.84 cw(c-1540.73,1063.65) v2@-1525.74,1078.63 ; -1540.73,1084.84 ccw(c-1540.73,1106.04) v2@-1525.74,1091.05 ; -1540.73,1084.84 cw(c-1540.73,1063.65) v2@-1525.74,1078.63 ; -1540.73,1084.84 ccw(c-1540.73,1106.04) v2@-1525.74,1091.05 ; -1540.73,1084.84 ccw(c-1540.73,1106.04) v2@-1525.74,1091.05 ; -1540.73,1084.84 cw(c-1540.73,1063.65) v2@-1525.74,1078.63 ; -1540.73,1084.84 ccw(c-1540.73,1106.04) v2@-1525.74,1091.05 ; -1540.73,1084.84 cw(c-1540.73,1063.65) v2@-1525.74,1078.63 ; -1540.73,1084.84 ccw(c-1540.73,1106.04) v2@-1525.74,1091.05 ; -1540.73,1084.84 cw(c-1540.73,1063.65) v2@-1525.74,1078.63
X-STEP: U3.16 U8.16 | length 4132.6
  TopLayer w10: U3.16@-3465.62,1868.88 -3393.57,1868.88 v2(-3349.54,1824.84) ; v2(-3082.54,1526.84) -3059.54,1503.84 -2960.54,1503.84 -2940.69,1484 -2584,1484 -2530.84,1430.84 -2332.54,1430.84 v2(-2284.54,1382.84) ; v2(-1541.54,1048.84) -1466.54,1048.84 -1445.54,1027.84 U8.16@-1445.54,908.84 ; -3364.52,1839.83 cw(c-3379.51,1824.84) v2@-3358.31,1824.84 ; -3364.52,1839.83 ccw(c-3349.54,1854.82) v2@-3349.54,1833.62 ; -3364.52,1839.83 cw(c-3379.51,1824.84) v2@-3358.31,1824.84 ; -3364.52,1839.83 ccw(c-3349.54,1854.82) v2@-3349.54,1833.62 ; -3364.52,1839.83 cw(c-3379.51,1824.84) v2@-3358.31,1824.84 ; -3364.52,1839.83 ccw(c-3349.54,1854.82) v2@-3349.54,1833.62 ; -3364.52,1839.83 cw(c-3379.51,1824.84) v2@-3358.31,1824.84 ; -3364.52,1839.83 ccw(c-3349.54,1854.82) v2@-3349.54,1833.62 ; -3364.52,1839.83 cw(c-3379.51,1824.84) v2@-3358.31,1824.84 ; -3364.52,1839.83 ccw(c-3349.54,1854.82) v2@-3349.54,1833.62 ; -3364.52,1839.83 ccw(c-3349.54,1854.82) v2@-3349.54,1833.62 ; -3364.52,1839.83 cw(c-3379.51,1824.84) v2@-3358.31,1824.84 ; -3364.52,1839.83 ccw(c-3349.54,1854.82) v2@-3349.54,1833.62 ; -3364.52,1839.83 cw(c-3379.51,1824.84) v2@-3358.31,1824.84 ; -3364.52,1839.83 ccw(c-3349.54,1854.82) v2@-3349.54,1833.62 ; -3364.52,1839.83 cw(c-3379.51,1824.84) v2@-3358.31,1824.84 ; -3364.52,1839.83 ccw(c-3349.54,1854.82) v2@-3349.54,1833.62 ; -3364.52,1839.83 cw(c-3379.51,1824.84) v2@-3358.31,1824.84 ; v2@-1535.33,1042.63 cw(c-1520.34,1027.65) -1520.34,1048.84 ; v2@-1535.33,1042.63 cw(c-1520.34,1027.65) -1520.34,1048.84 ; v2@-1535.33,1042.63 cw(c-1520.34,1027.65) -1520.34,1048.84 ; v2@-1535.33,1042.63 cw(c-1520.34,1027.65) -1520.34,1048.84 ; v2@-1535.33,1042.63 cw(c-1520.34,1027.65) -1520.34,1048.84 ; v2@-1535.33,1042.63 cw(c-1520.34,1027.65) -1520.34,1048.84 ; v2@-1535.33,1055.05 ccw(c-1520.34,1070.04) -1520.34,1048.84 ; v2@-1535.33,1055.05 ccw(c-1520.34,1070.04) -1520.34,1048.84 ; v2@-1535.33,1055.05 ccw(c-1520.34,1070.04) -1520.34,1048.84 ; v2@-1535.33,1055.05 ccw(c-1520.34,1070.04) -1520.34,1048.84 ; v2@-1535.33,1055.05 ccw(c-1520.34,1070.04) -1520.34,1048.84 ; v2@-1535.33,1055.05 ccw(c-1520.34,1070.04) -1520.34,1048.84 ; U8.16@-1448.36,933.67 ccw(c-1455.19,940.5) -1445.54,940.5 ; U8.16@-1448.36,933.67 ccw(c-1455.19,940.5) -1445.54,940.5 ; U8.16@-1448.36,933.67 ccw(c-1455.19,940.5) -1445.54,940.5 ; U8.16@-1448.36,933.67 ccw(c-1455.19,940.5) -1445.54,940.5 ; U8.16@-1448.36,933.67 ccw(c-1455.19,940.5) -1445.54,940.5 ; U8.16@-1448.36,933.67 ccw(c-1455.19,940.5) -1445.54,940.5 ; -1445.54,940.5 ccw(c-1435.88,940.5) U8.16@-1442.71,933.67 ; -1445.54,940.5 ccw(c-1435.88,940.5) U8.16@-1442.71,933.67 ; -1445.54,940.5 ccw(c-1435.88,940.5) U8.16@-1442.71,933.67 ; -1445.54,940.5 ccw(c-1435.88,940.5) U8.16@-1442.71,933.67 ; -1445.54,940.5 ccw(c-1435.88,940.5) U8.16@-1442.71,933.67 ; -1445.54,940.5 ccw(c-1435.88,940.5) U8.16@-1442.71,933.67
  BottomLayer w10: v2(-3349.54,1824.84) -3160.54,1635.84 -3160.54,1604.84 v2(-3082.54,1526.84) ; v2(-2284.54,1382.84) -1694.54,1382.84 -1633.54,1321.84 -1633.54,1086.84 -1595.54,1048.84 v2(-1541.54,1048.84) ; v2@-3349.54,1816.06 cw(c-3349.54,1794.87) -3334.55,1809.85 ; v2@-3349.54,1816.06 cw(c-3349.54,1794.87) -3334.55,1809.85 ; v2@-3349.54,1816.06 cw(c-3349.54,1794.87) -3334.55,1809.85 ; v2@-3349.54,1816.06 cw(c-3349.54,1794.87) -3334.55,1809.85 ; v2@-3349.54,1816.06 cw(c-3349.54,1794.87) -3334.55,1809.85 ; v2@-3349.54,1816.06 cw(c-3349.54,1794.87) -3334.55,1809.85 ; v2@-3349.54,1816.06 cw(c-3349.54,1794.87) -3334.55,1809.85 ; v2@-3349.54,1816.06 cw(c-3349.54,1794.87) -3334.55,1809.85 ; v2@-3349.54,1816.06 cw(c-3349.54,1794.87) -3334.55,1809.85 ; v2@-3340.76,1824.84 ccw(c-3319.56,1824.84) -3334.55,1809.85 ; v2@-3340.76,1824.84 ccw(c-3319.56,1824.84) -3334.55,1809.85 ; v2@-3340.76,1824.84 ccw(c-3319.56,1824.84) -3334.55,1809.85 ; v2@-3340.76,1824.84 ccw(c-3319.56,1824.84) -3334.55,1809.85 ; v2@-3340.76,1824.84 ccw(c-3319.56,1824.84) -3334.55,1809.85 ; v2@-3340.76,1824.84 ccw(c-3319.56,1824.84) -3334.55,1809.85 ; v2@-3340.76,1824.84 ccw(c-3319.56,1824.84) -3334.55,1809.85 ; v2@-3340.76,1824.84 ccw(c-3319.56,1824.84) -3334.55,1809.85 ; v2@-3340.76,1824.84 ccw(c-3319.56,1824.84) -3334.55,1809.85 ; v2@-2278.33,1376.63 cw(c-2263.34,1361.65) -2263.34,1382.84 ; v2@-2278.33,1376.63 cw(c-2263.34,1361.65) -2263.34,1382.84 ; v2@-2278.33,1376.63 cw(c-2263.34,1361.65) -2263.34,1382.84 ; v2@-2278.33,1376.63 cw(c-2263.34,1361.65) -2263.34,1382.84 ; v2@-2278.33,1376.63 cw(c-2263.34,1361.65) -2263.34,1382.84 ; v2@-2278.33,1376.63 cw(c-2263.34,1361.65) -2263.34,1382.84 ; v2@-2278.33,1376.63 cw(c-2263.34,1361.65) -2263.34,1382.84 ; v2@-2278.33,1376.63 cw(c-2263.34,1361.65) -2263.34,1382.84 ; v2@-2278.33,1376.63 cw(c-2263.34,1361.65) -2263.34,1382.84 ; v2@-2278.33,1389.05 ccw(c-2263.34,1404.04) -2263.34,1382.84 ; v2@-2278.33,1389.05 ccw(c-2263.34,1404.04) -2263.34,1382.84 ; v2@-2278.33,1389.05 ccw(c-2263.34,1404.04) -2263.34,1382.84 ; v2@-2278.33,1389.05 ccw(c-2263.34,1404.04) -2263.34,1382.84 ; v2@-2278.33,1389.05 ccw(c-2263.34,1404.04) -2263.34,1382.84 ; v2@-2278.33,1389.05 ccw(c-2263.34,1404.04) -2263.34,1382.84 ; v2@-2278.33,1389.05 ccw(c-2263.34,1404.04) -2263.34,1382.84 ; v2@-2278.33,1389.05 ccw(c-2263.34,1404.04) -2263.34,1382.84 ; v2@-2278.33,1389.05 ccw(c-2263.34,1404.04) -2263.34,1382.84 ; -1562.73,1048.84 cw(c-1562.73,1027.65) v2@-1547.74,1042.63 ; -1562.73,1048.84 ccw(c-1562.73,1070.04) v2@-1547.74,1055.05 ; -1562.73,1048.84 cw(c-1562.73,1027.65) v2@-1547.74,1042.63 ; -1562.73,1048.84 ccw(c-1562.73,1070.04) v2@-1547.74,1055.05 ; -1562.73,1048.84 cw(c-1562.73,1027.65) v2@-1547.74,1042.63 ; -1562.73,1048.84 ccw(c-1562.73,1070.04) v2@-1547.74,1055.05 ; -1562.73,1048.84 cw(c-1562.73,1027.65) v2@-1547.74,1042.63 ; -1562.73,1048.84 ccw(c-1562.73,1070.04) v2@-1547.74,1055.05 ; -1562.73,1048.84 cw(c-1562.73,1027.65) v2@-1547.74,1042.63 ; -1562.73,1048.84 ccw(c-1562.73,1070.04) v2@-1547.74,1055.05 ; -1562.73,1048.84 ccw(c-1562.73,1070.04) v2@-1547.74,1055.05 ; -1562.73,1048.84 cw(c-1562.73,1027.65) v2@-1547.74,1042.63 ; -1562.73,1048.84 ccw(c-1562.73,1070.04) v2@-1547.74,1055.05 ; -1562.73,1048.84 cw(c-1562.73,1027.65) v2@-1547.74,1042.63 ; -1562.73,1048.84 ccw(c-1562.73,1070.04) v2@-1547.74,1055.05 ; -1562.73,1048.84 cw(c-1562.73,1027.65) v2@-1547.74,1042.63 ; -1562.73,1048.84 ccw(c-1562.73,1070.04) v2@-1547.74,1055.05 ; -1562.73,1048.84 cw(c-1562.73,1027.65) v2@-1547.74,1042.63
X-STOP: C5.1 R1.1 U8.21 X-STOP.1 | length 1328.1
  TopLayer w10: R1.1@-1434.61,530.91 ccw(c-1451.68,547.98) -1427.54,547.98 ccw(c-1403.39,547.98) R1.1@-1420.46,530.91 ; C5.1@-1433.54,417.84 C5.1@-1427.54,423.84 ; R1.1@-1427.54,523.84 -1427.54,600.84 -1402.54,625.84 -1303.54,625.84 -1287.54,641.84 U8.21@-1287.54,908.84 ; U8.21@-1290.36,884.01 cw(c-1297.19,877.18) -1287.54,877.18 ; U8.21@-1290.36,884.01 cw(c-1297.19,877.18) -1287.54,877.18 ; U8.21@-1290.36,884.01 cw(c-1297.19,877.18) -1287.54,877.18 ; U8.21@-1290.36,884.01 cw(c-1297.19,877.18) -1287.54,877.18 ; U8.21@-1290.36,884.01 cw(c-1297.19,877.18) -1287.54,877.18 ; U8.21@-1290.36,884.01 cw(c-1297.19,877.18) -1287.54,877.18 ; -1287.54,877.18 cw(c-1277.88,877.18) U8.21@-1284.71,884.01 ; -1287.54,877.18 cw(c-1277.88,877.18) U8.21@-1284.71,884.01 ; -1287.54,877.18 cw(c-1277.88,877.18) U8.21@-1284.71,884.01 ; -1287.54,877.18 cw(c-1277.88,877.18) U8.21@-1284.71,884.01 ; -1287.54,877.18 cw(c-1277.88,877.18) U8.21@-1284.71,884.01 ; -1287.54,877.18 cw(c-1277.88,877.18) U8.21@-1284.71,884.01
  TopLayer w25: X-STOP.1@-1620.97,164.27 ccw(c-1653.4,196.7) -1607.54,196.7 ccw(c-1561.67,196.7) X-STOP.1@-1594.1,164.27 ; X-STOP.1@-1607.54,150.84 -1607.54,284.84 -1590.54,301.84 -1523.54,301.84 -1447.54,301.84 -1433.54,315.84 C5.1@-1433.54,417.84 ; C5.1@-1437.37,409 cw(c-1461.13,385.25) -1427.54,385.25 ; C5.1@-1437.37,426.68 ccw(c-1461.13,450.43) -1427.54,450.43 ; -1427.54,390.08 cw(c-1400.77,390.08) C5.1@-1419.7,409 ; C5.1@-1427.54,423.84 R1.1@-1427.54,523.84 ; -1427.54,445.61 ccw(c-1400.77,445.61) C5.1@-1419.7,426.68